# Altium PCB STM32F4_Template.PcbDoc
Units mil, origin at the board's own origin, x right, y up, seen from the top; angles counter-clockwise.
Board outline 3000 x 3050 mil, 4 copper layers (Top Layer, Ground Layer, Power Layer, Bottom Layer), stack 62.631 mil thick; 47 components, 31 nets, 206 pads, 112 vias.
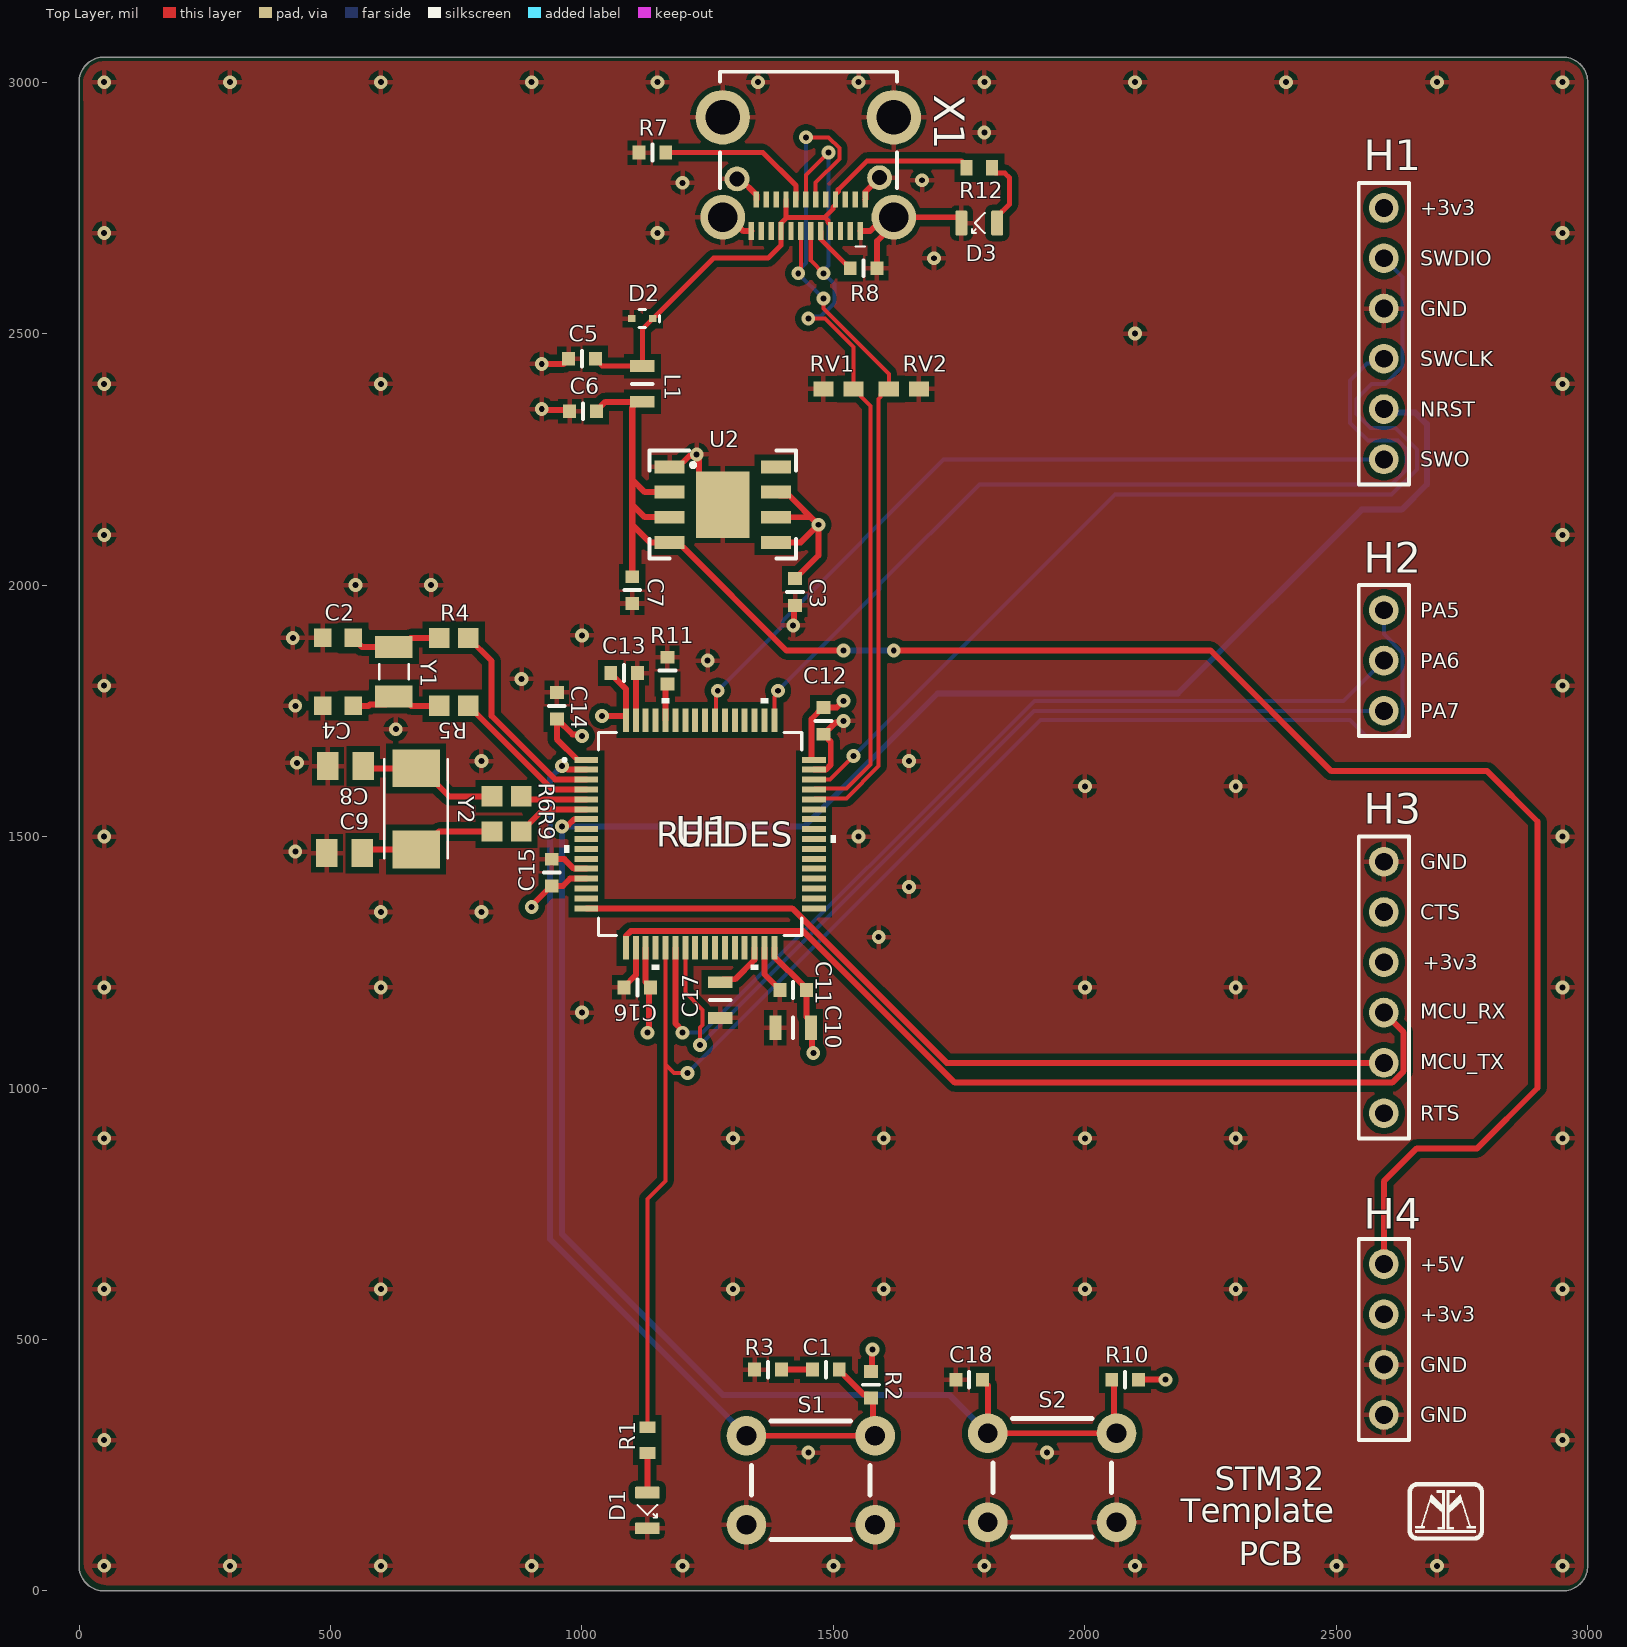
[diagram p0: Top Layer view]
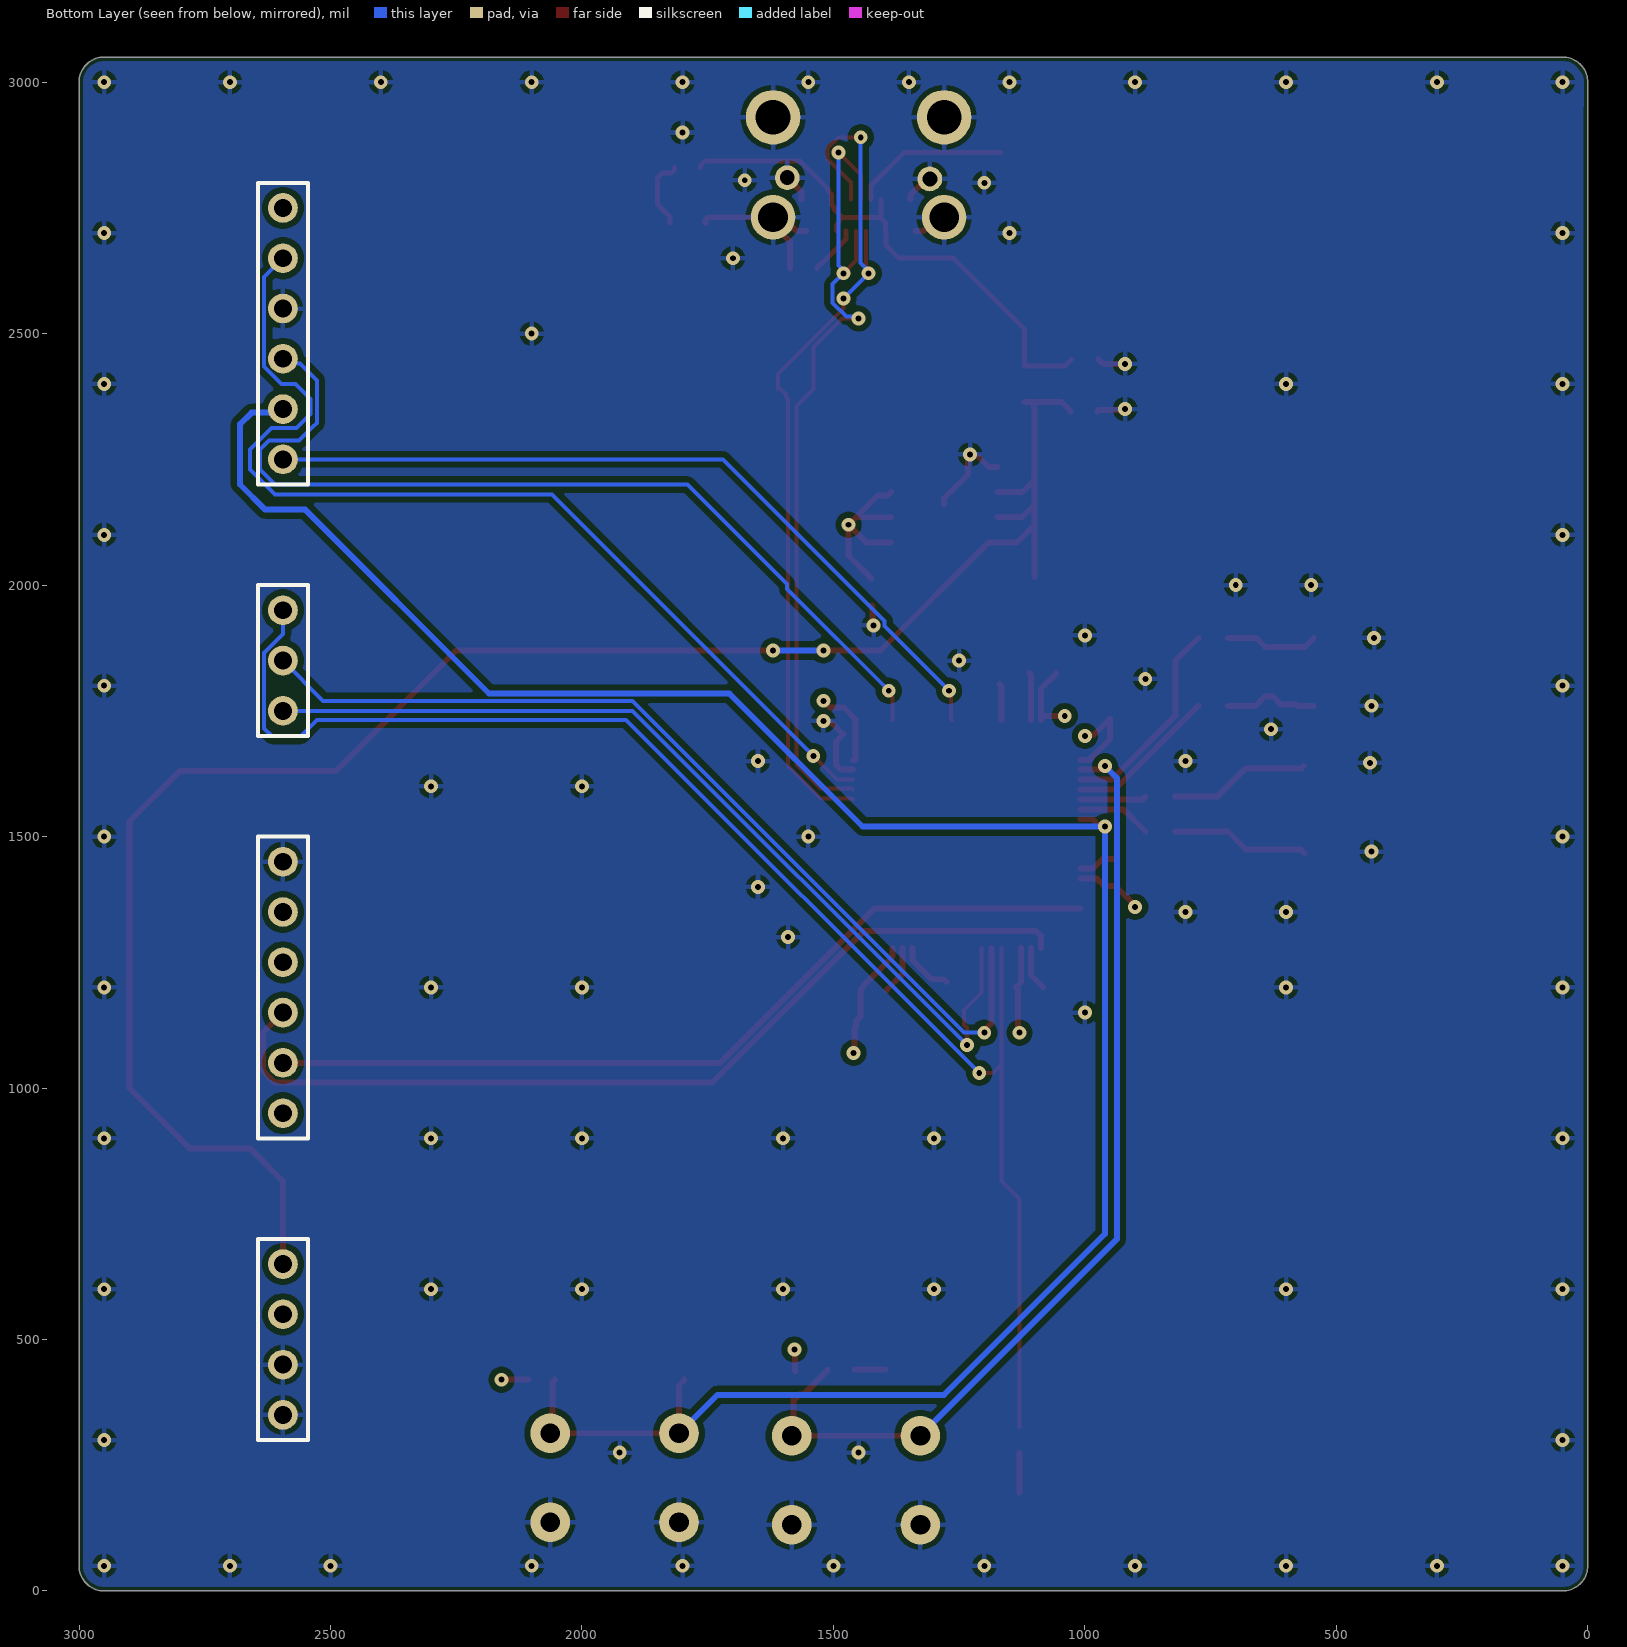
[diagram p1: Bottom Layer view, seen from below]
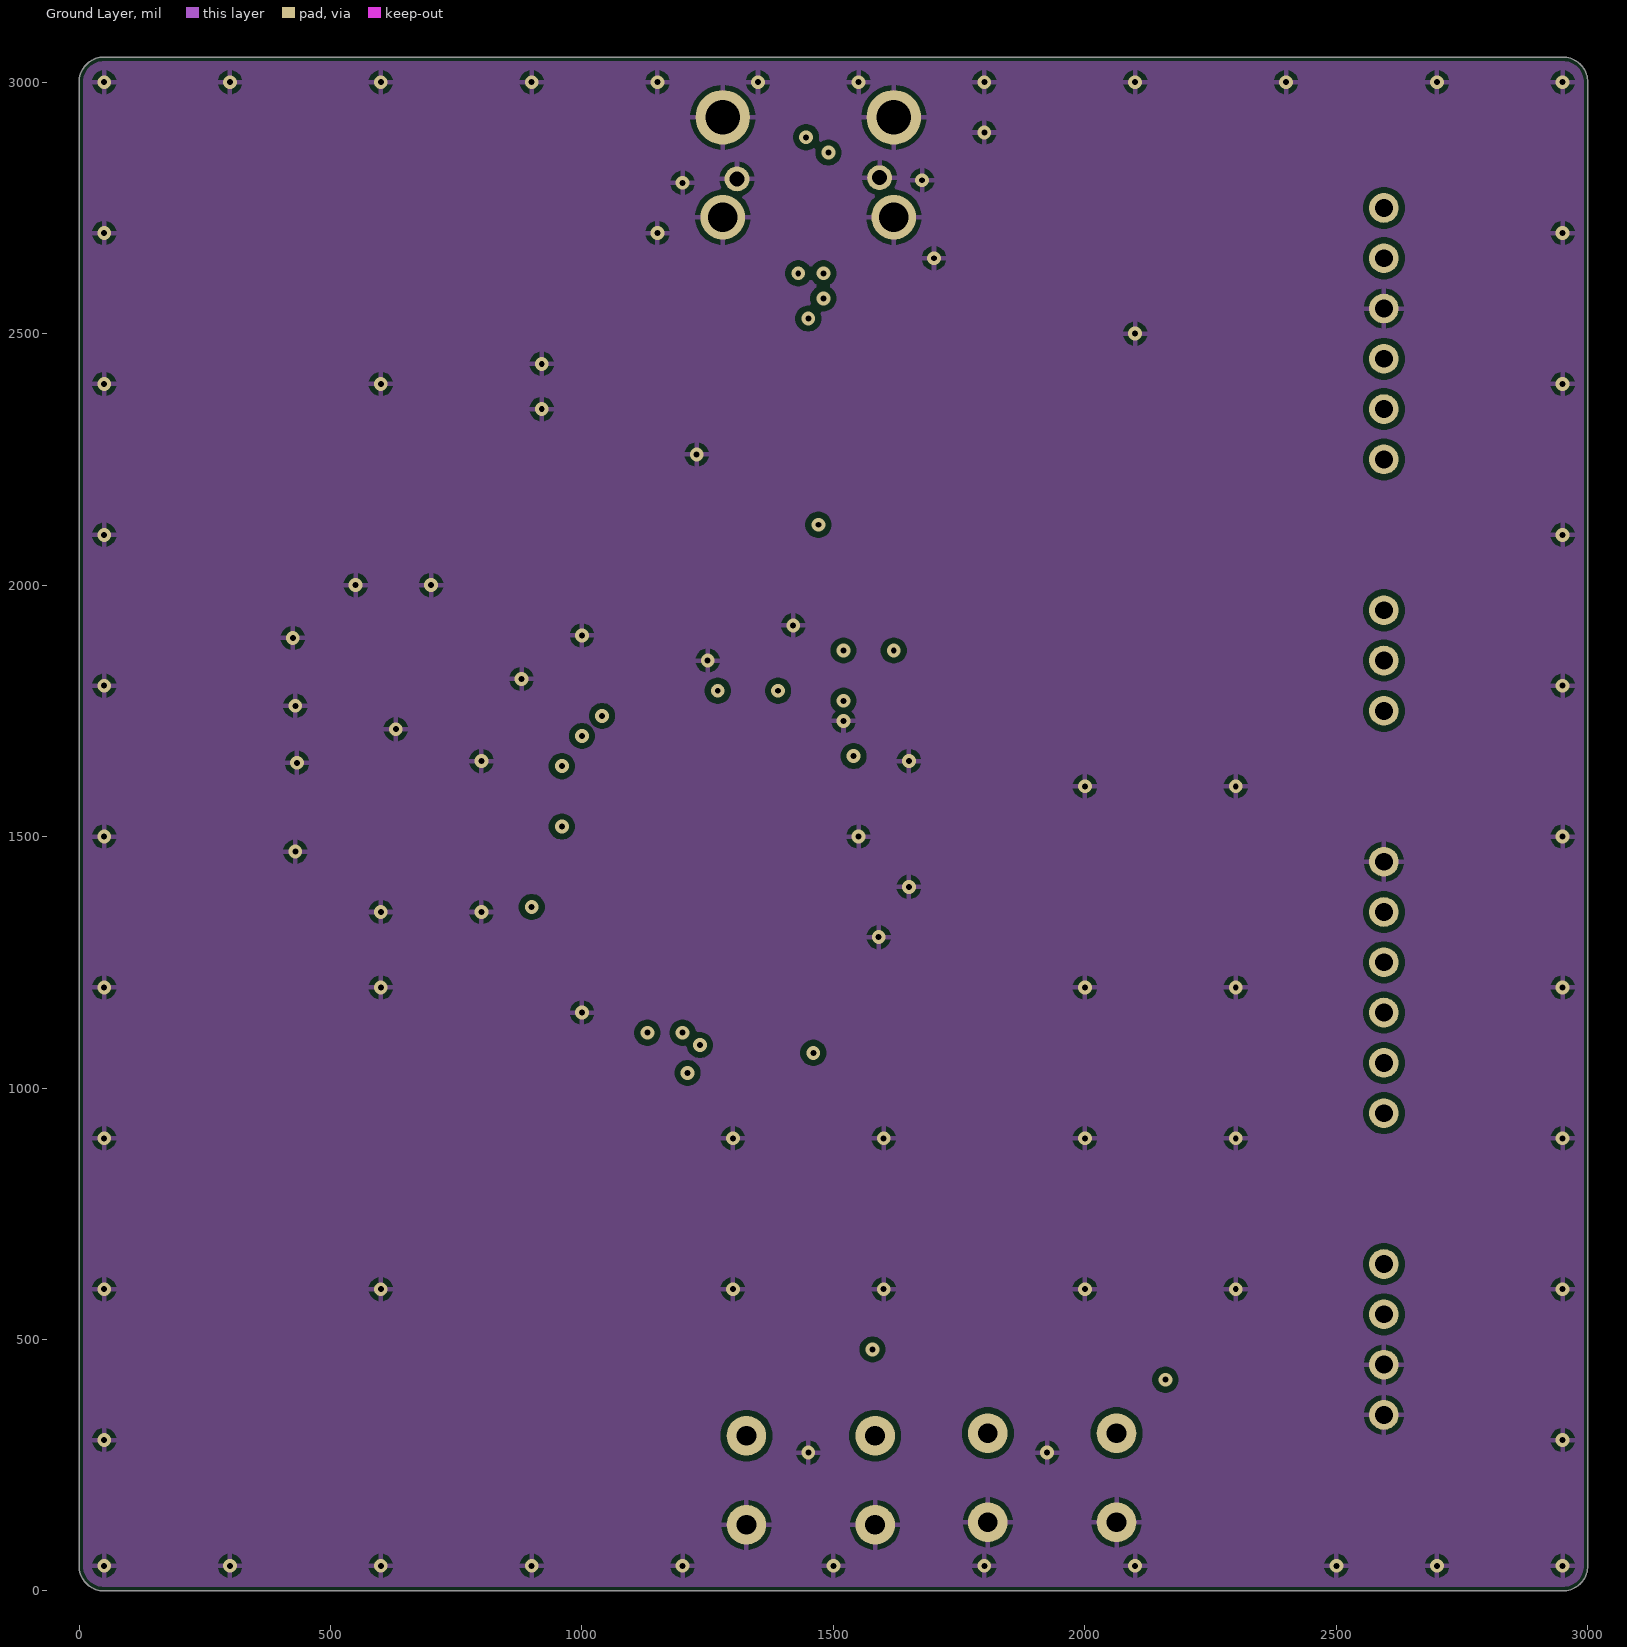
[diagram p2: Ground Layer]
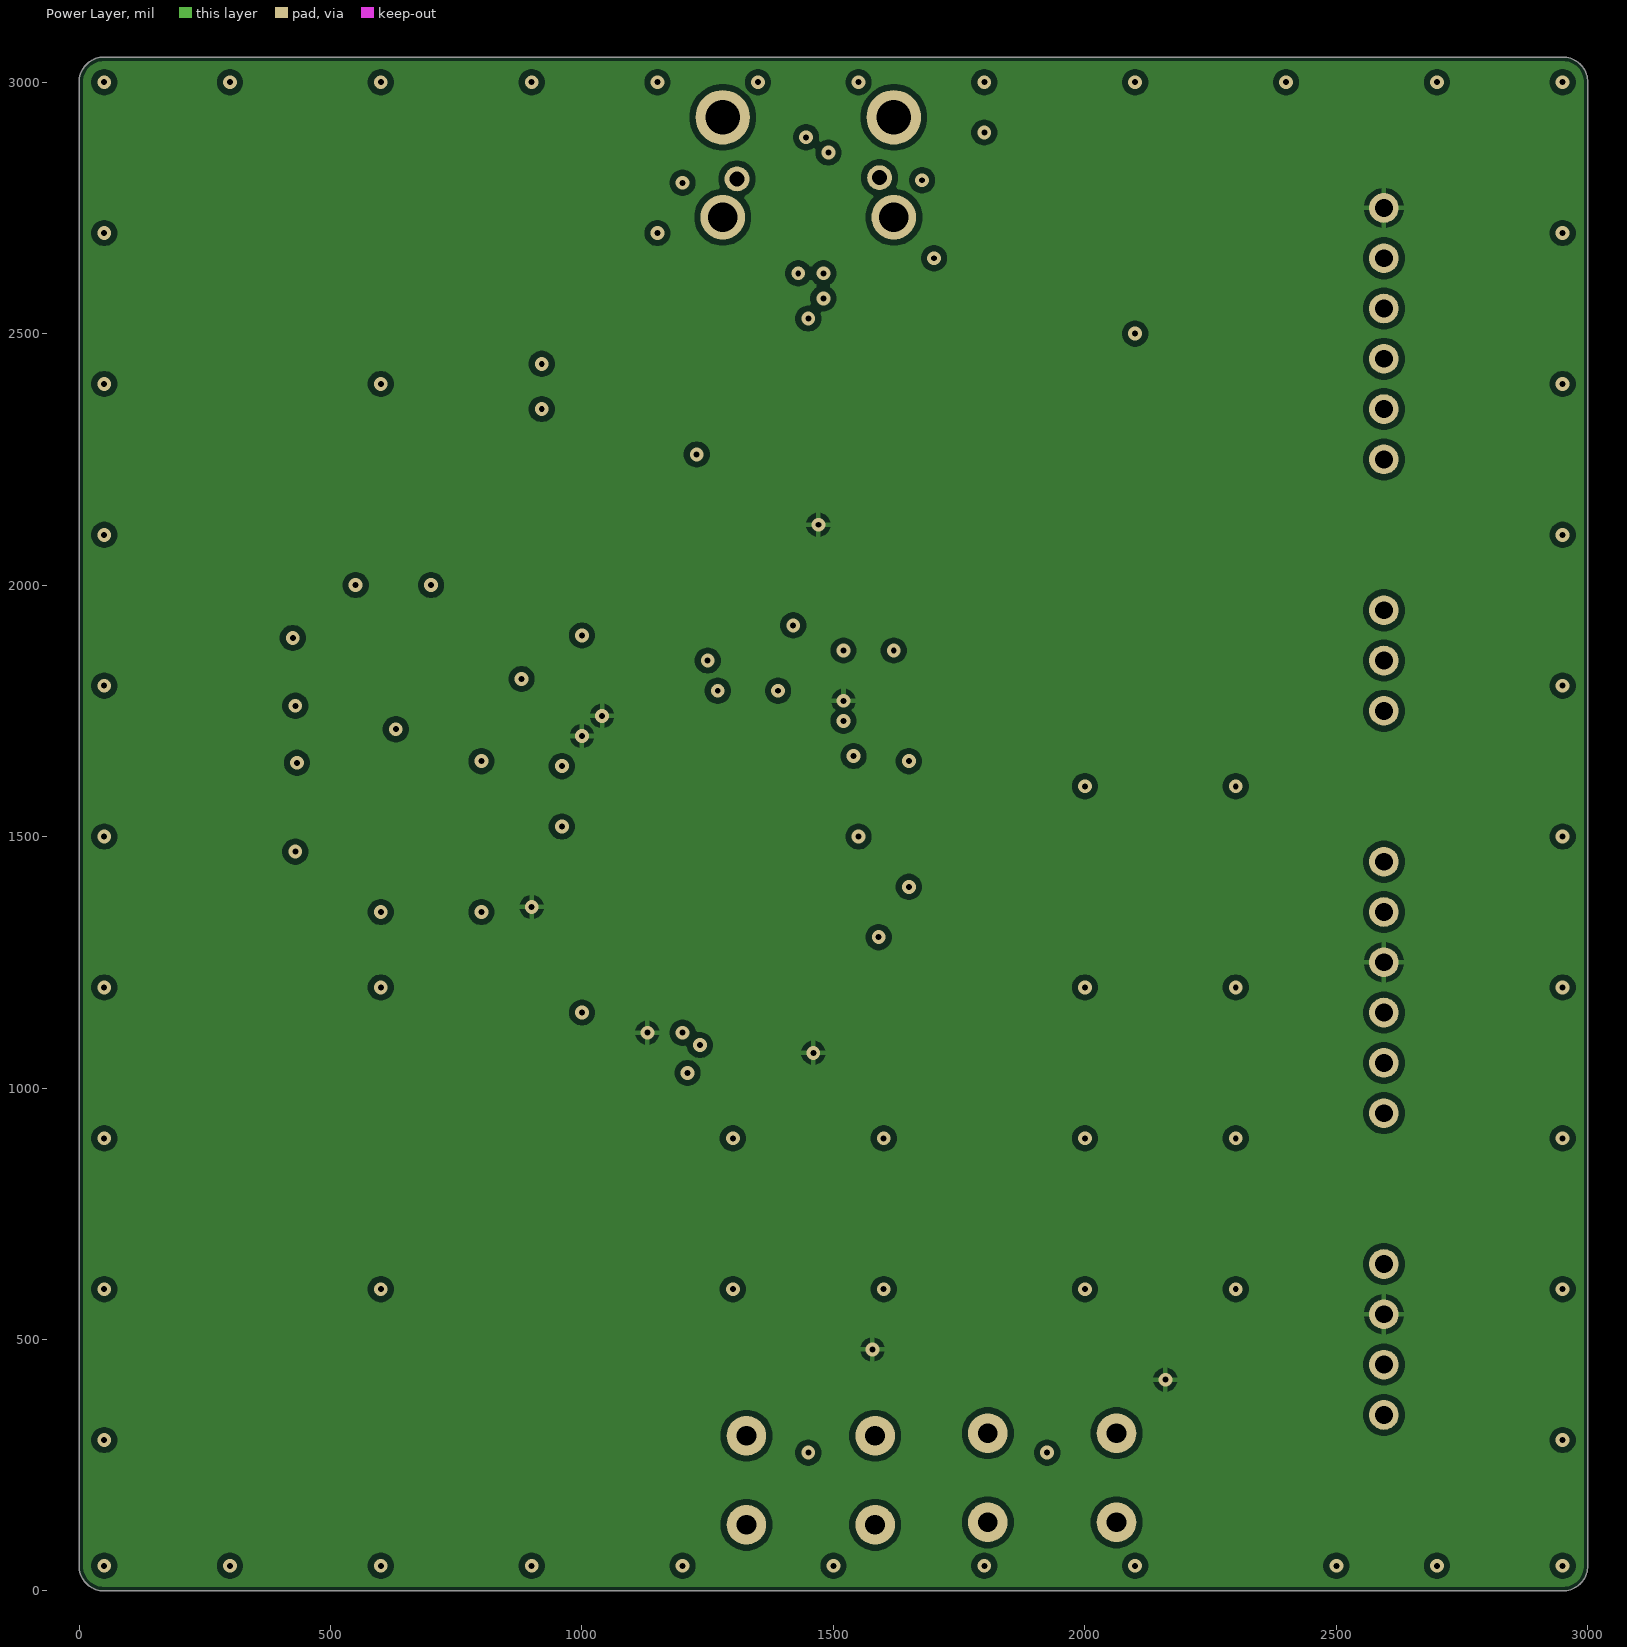
[diagram p3: Power Layer]
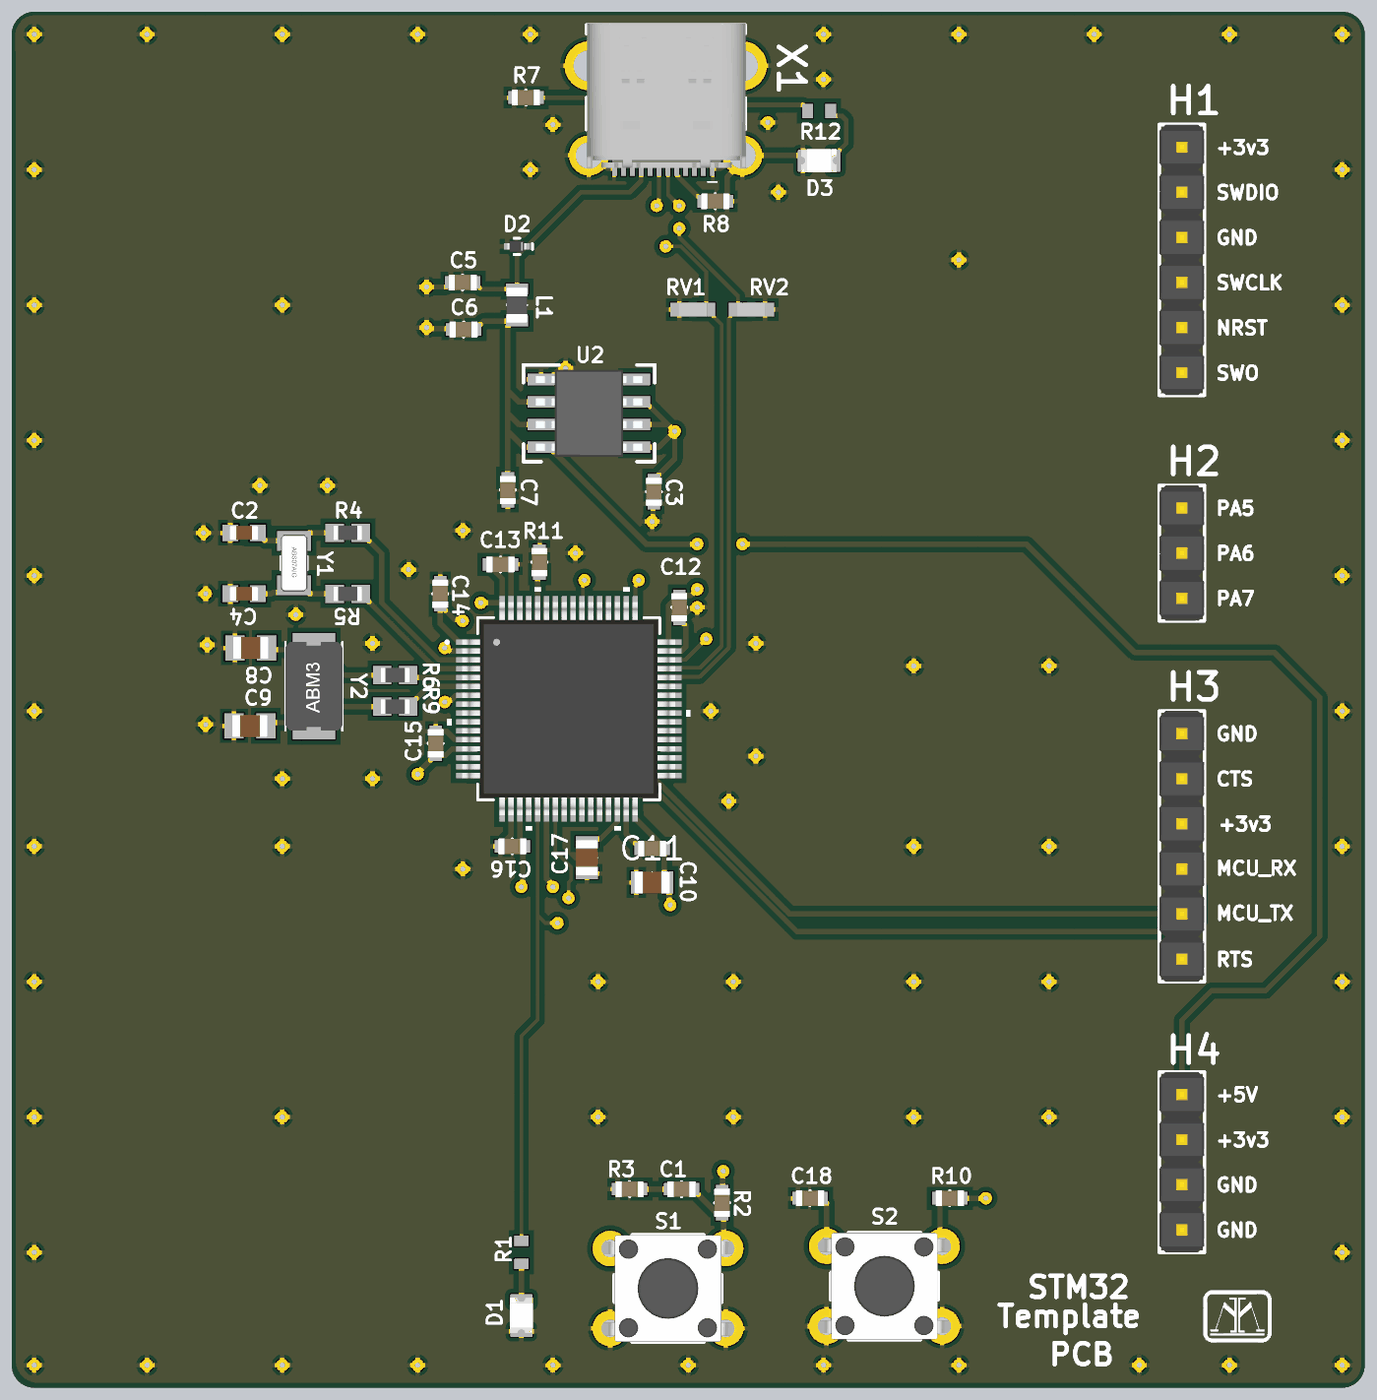
[diagram p4: 3D render of the assembled board from above, using the file's embedded part models]

## Layer stack, top to bottom
Top Solder: solder mask 0.4, Solder Resist, Dk 3.8
Top Layer: signal copper 1.378
Dielectric 2: prepreg 8.2839, 7628*1, Dk 4.4
Ground Layer: signal copper 0.689
Dielectric 1: dielectric 41.9291, FR-4, Dk 4.8
Power Layer: signal copper 0.689
Dielectric 3: prepreg 8.2839, 7628*1, Dk 4.4
Bottom Layer: signal copper 1.378
Bottom Solder: solder mask 0.4, Solder Resist, Dk 3.8

## Board outline
0,3000 cw(c50,3000) 50,3050 2950,3050 cw(c2950,3000) 3000,3000 3000,50 cw(c2950,50) 2950,0 50,0 cw(c50,50) 0,50

## Design rules (kind name [scope] priority, off if disabled: settings)
BoardOutlineClearance [All] p1: gap=7.87 ignorepadtopadclearanceinfootprint=FALSE
Clearance "inPolygon Clearance" [InPolygon] p1: gap=11.81 ignorepadtopadclearanceinfootprint=TRUE // this rule ensures that every net within a polygon of a different net has a set clearance from the poly
Clearance "Different Diff Pair" [All] p2: gap=7.87 ignorepadtopadclearanceinfootprint=TRUE
Clearance "Same Diff Pair" [All] p3: gap=3.94 ignorepadtopadclearanceinfootprint=TRUE
Clearance "Different Nets" [not InAnyDifferentialPair] p4: gap=11.81 ignorepadtopadclearanceinfootprint=TRUE except(3.94: Arc-SMDPad Arc-THPad Arc-Via Arc-Text Track-SMDPad Track-THPad Track-Via Track-Text SMDPad-Text THPad-Text Via-Text Fill-Text Poly-Text Region-Text Text-Text; 4.72: Arc-Arc Arc-Track Track-Track; 5.91: SMDPad-SMDPad SMDPad-THPad SMDPad-Via THPad-THPad THPad-Via Via-Via; 7.87: Arc-Hole Track-Hole SMDPad-Hole THPad-Hole Via-Hole Fill-Hole Poly-Hole Region-Hole Text-Hole)
Clearance "Same Net" [not InAnyDifferentialPair] p5: gap=0 ignorepadtopadclearanceinfootprint=TRUE except(3.94: THPad-Via; 7.09: Arc-Arc Arc-Track Track-Track)
ComponentClearance [All] p1: gap=4 collisioncheckmode=3 verticalgap=4 showdistances=TRUE
DiffPairsRouting "Ethernet Routing" [InDifferentialPairClass('Ethernet_Pairs')] p1: maxlimit=9.84 minlimit=7.87 mostfreqgap=9.84 toplayer_maxgap=7.87 toplayer_prefgap=7.87 toplayer_minwidth=9.84 toplayer_maxwidth=9.84 toplayer_prefwidth=9.84 midlayer1_mingap=9.84 midlayer1_minwidth=7.48 midlayer1_maxwidth=7.48 midlayer1_prefwidth=7.48 midlayer2_mingap=9.84 midlayer2_minwidth=7.48 midlayer2_maxwidth=7.48 midlayer2_prefwidth=7.48 bottomlayer_maxgap=7.87 bottomlayer_prefgap=7.87 bottomlayer_minwidth=9.84 bottomlayer_maxwidth=9.84 bottomlayer_prefwidth=9.84 impedanceprofiledriven=TRUE maxuncoupledlength=500
DiffPairsRouting "USB Routing" [InDifferentialPairClass('USB_Pairs')] p2: maxlimit=11.45 minlimit=4.99 mostfreqgap=11.45 toplayer_maxgap=4.99 toplayer_prefgap=4.99 toplayer_minwidth=9.07 toplayer_maxwidth=9.07 toplayer_prefwidth=9.07 midlayer1_mingap=11.45 midlayer1_minwidth=9.84 midlayer1_maxwidth=9.84 midlayer1_prefwidth=9.84 midlayer2_mingap=11.45 midlayer2_minwidth=9.84 midlayer2_maxwidth=9.84 midlayer2_prefwidth=9.84 bottomlayer_maxgap=4.99 bottomlayer_prefgap=4.99 bottomlayer_minwidth=9.07 bottomlayer_maxwidth=9.07 bottomlayer_prefwidth=9.07 impedanceprofiledriven=TRUE impedanceprofileid={ED78B7FE-5BC8-4D43-B126-C4DF268A2158} impedanceprofilevalue=90.000000 maxuncoupledlength=500
DiffPairsRouting "CAN Routing" [InDifferentialPairClass('CAN_Pairs')] p3: maxlimit=35.69 minlimit=19.68 mostfreqgap=35.69 toplayer_maxgap=19.68 toplayer_prefgap=19.68 toplayer_minwidth=7.93 toplayer_maxwidth=7.93 toplayer_prefwidth=7.93 midlayer1_mingap=35.69 midlayer1_minwidth=6.1 midlayer1_maxwidth=6.1 midlayer1_prefwidth=6.1 midlayer2_mingap=35.69 midlayer2_minwidth=6.1 midlayer2_maxwidth=6.1 midlayer2_prefwidth=6.1 bottomlayer_maxgap=19.68 bottomlayer_prefgap=19.68 bottomlayer_minwidth=7.93 bottomlayer_maxwidth=7.93 bottomlayer_prefwidth=7.93 impedanceprofiledriven=TRUE maxuncoupledlength=500
Height [All] p1: minheight=0 maxheight=71497.94 prefheight=500
HoleSize [All] p1: absolutevalues=TRUE maxlimit=248.03 minlimit=11.81 maxpercent=80.000 minpercent=20.000
HoleToHoleClearance [All] p1: gap=9.84 allowstackedmicrovias=FALSE
Length [All] p1: maxlimit=1709.92 minlimit=0 usedelayunits=TRUE mindelay=0.000000 maxdelay=10000.000000
MatchedLengths "Diff Pair Matched Delays" [InDifferentialPairClass('Ethernet_Pairs') or InDifferentialPairClass('USB_Pairs') or InDifferentialPairClass('CAN_Pairs')] p1: tolerance=196.85 checknetsindiffpair=TRUE checkdiffpairvsdiffpair=FALSE checkxsignals=FALSE checkothers=FALSE usedelayunits=TRUE delaytolerance=100.000000
MinimumAnnularRing [All] p1: minimumring=7.87
MinimumSolderMaskSliver [All] p1: minsoldermaskwidth=0
PlaneClearance "Supply Net Clearance" [InNetClass('Supply_Nets')] p1: clearance=19.68
PlaneClearance "All Nets" [All] p2: clearance=11.81
PolygonConnect "Supply Nets" [InNetClass('Supply_Nets')] p1: connectstyle=Relief reliefconductorwidth=11.81 reliefentries=4 polygonreliefangle="90 Angle" conductorbypadedge=TRUE mindistance=15 enablemindistance=FALSE airgapwidth=10
PolygonConnect General [All] p2: connectstyle=Relief reliefconductorwidth=10 reliefentries=4 polygonreliefangle="90 Angle" airgapwidth=10
RoutingVias [All] p1: holewidth=7.87 width=13.78 viastyle="Through Hole" minholewidth=5.91 minwidth=11.81 maxholewidth=248.03 maxwidth=257.87
SilkToSilkClearance [All] p1: silktosilkclearance=0
SilkToSolderMaskClearance [All] p1: minsilkscreentomaskgap=0 clearancetoexposedcopper=TRUE
SolderMaskExpansion [All] p1: expansion=2.95 istentingtop=FALSE
SupplyNets "Schematic Supply Nets_3" [InNet('GND')] p1: voltage=0.000
SupplyNets "Schematic Supply Nets_8" [InNet('RUN')] p2: voltage=0.000
SupplyNets "Schematic Supply Nets_6" [InNet('XOUT')] p3: voltage=0.000
SupplyNets "Schematic Supply Nets_4" [InNet('+1V1')] p4: voltage=0.000
SupplyNets "Schematic Supply Nets_2" [InNet('+5V')] p5: voltage=0.000
SupplyNets "Schematic Supply Nets" [InNet('XIN')] p6: voltage=0.000
SupplyNets "Schematic Supply Nets_7" [InNet('+3V3')] p7: voltage=0.000
SupplyNets "Schematic Supply Nets_1" [InNet('Earth')] p8: voltage=0.000
UnRoutedNet [All] p1: checkbadconnections=TRUE
Width "nRF Width" [InNetClass('nRF Signal')] p1: maxlimit=14.94 minlimit=10.37 preferedwidth=14.94 toplayer_minwidth=14.94 midlayer1_maxwidth=10.37 midlayer1_prefwidth=10.37 midlayer2_maxwidth=10.37 midlayer2_prefwidth=10.37 bottomlayer_minwidth=14.94 impedanceprofiledriven=TRUE minimp=50.000000 maximp=50.000000 favimp=50.000000 checkconnectedcopper=TRUE
Width [All] p2: maxlimit=3937.01 minlimit=3.94 preferedwidth=11.81
20 further rules are at their usual default settings.

## Classes and differential pairs
differential pair class DIFF_USB: USB_D
differential pair USB_D: +USB_D_P -USB_D_N

## Components (designator, comment, footprint, x,y, rotation, side; value= is the part's Value field where it differs from the comment)
C1 "[Cap] 0603 0.1uF 10% 16V" "[Cap] SMD 0603" 1485,440 r0 top
C2 "8pF" "[Cap] 0603 8pF ±0.1pF 50V" 515,1895 r180 top
C3 "[Cap] 0603 10uF 10% 10V" "[Cap] SMD 0603" 1423.78,1986.22 r270 top
C4 "8pF" "[Cap] 0603 8pF ±0.1pF 50V" 515,1760 r180 top
C5 "[Cap] 0603 0.1uF 10% 16V" "[Cap] SMD 0603" 1000,2450 r180 top
C6 "[Cap] 0603 0.1uF 10% 16V" "[Cap] SMD 0603" 1001.97,2345.59 r180 top
C7 "[Cap] 0603 10uF 10% 10V" "[Cap] SMD 0603" 1100,1990 r90 top
C8 "[Cap] 0805 18pF ±5% 250V" "[Cap] 0805 ±5% 250V" 530,1640 r180 top
C9 "[Cap] 0805 18pF ±5% 250V" "[Cap] 0805 ±5% 250V" 528,1467 r180 top
C10 "[Cap] 0805 4.7uF 10% 50V" "[Cap] SMD 0805" 1420,1120 r0 top
C11 "[Cap] 0603 0.1uF 10% 16V" "[Cap] SMD 0603" 1420,1195 r0 top
C12 "[Cap] 0603 0.1uF 10% 16V" "[Cap] SMD 0603" 1480,1730 r270 top
C13 "[Cap] 0603 0.1uF 10% 16V" "[Cap] SMD 0603" 1083.78,1825 r0 top
C14 "[Cap] 0603 0.1uF 10% 16V" "[Cap] SMD 0603" 950,1760 r90 top
C15 "[Cap] 0603 0.1uF 10% 16V" "[Cap] SMD 0603" 940,1428.43 r90 top
C16 "[Cap] 0603 0.1uF 10% 16V" "[Cap] SMD 0603" 1110,1200 r0 top
C17 "[Cap] 0805 4.7uF 10% 50V" "[Cap] SMD 0805" 1275,1175 r90 top
C18 "[Cap] 0603 0.1uF 10% 16V" "[Cap] SMD 0603" 1770,420 r180 top
D1 "[LED] SMD 0805 Green" "[LED] SMD 0805" 1130,160 r270 top
D2 "Cathode side marked by line" "[TVS] UNIDIRECTIONAL FOR 5V ESD" 1120,2530 r180 top
D3 "[LED] SMD 0805 Red" "[LED] SMD 0805" 1790,2720 r180 top
H1 "SWD Header" "[Header] 1x6 Male STM32 SWD" 2594.56,2500 r270 top
H2 "GPIO Header" "[Header] 1x3 Male GPIO" 2594.55,1850 r270 top
H3 "UART Header" "[Header] 1x6 Male STM32 UART" 2594.56,1200 r270 top
H4 "1x4 Header" "[Header] 1x4 Male Power" 2594.55,500 r270 top
L1 "652-MH2029-300Y" "[Ferrite] SMD 0805" 1120,2400 r270 top
R1 "RC0603JR-13470RL" RESC1608X55X25LL10T15 1130,300 r270 top
R2 "[10k] SMD 0603 1% 1/8W" "[Res] SMD 0603" 1575,410 r270 top
R3 "[100] SMD 0603 1% 1/10W" "[Res] SMD 0603" 1370,440 r0 top
R4 "[0] SMD 0603 5% 1/10W" "[0] SMD 0603 5% 1/10W" 745,1895 r180 top
R5 "[0] SMD 0603 5% 1/10W" "[0] SMD 0603 5% 1/10W" 745,1760 r180 top
R6 "[0] SMD 0603 5% 1/10W" "[0] SMD 0603 5% 1/10W" 850,1580 r180 top
R7 "[5.1k] SMD 0603 1% 1/10W" "[Res] SMD 0603" 1140,2860 r180 top
R8 "[5.1k] SMD 0603 1% 1/10W" "[Res] SMD 0603" 1560,2630 r0 top
R9 "[0] SMD 0603 5% 1/10W" "[0] SMD 0603 5% 1/10W" 850,1510 r180 top
R10 "[10k] SMD 0603 1% 1/8W" "[Res] SMD 0603" 2080,420 r0 top
R11 "[10k] SMD 0603 1% 1/8W" "[Res] SMD 0603" 1170,1830 r90 top
R12 "RC0603JR-13470RL" RESC1608X55X25LL10T15 1790,2830 r0 top
RV1 "[ESD] SMD Varistor for USB 3.3V lines" "[ESD] SMD Varistor for USB 3.3V lines" 1510,2390 r180 top
RV2 "[ESD] SMD Varistor for USB 3.3V lines" "[ESD] SMD Varistor for USB 3.3V lines" 1640,2390 r0 top
S1 "Standard pushbutton" "[SPST] Pushbutton" 1455,220 r180 top
S2 "Standard pushbutton" "[SPST] Pushbutton" 1935,225 r0 top
U1 "STM32F446RET6" STM32F446RET6 1235,1505 r0 top
U2 "3V3 1.5A" "[Linear] 3V3 1.5A" 1280,2160 r0 top
X1 "USB-C" "[USB] USB-C Right-Angle" 1450,2860 r180 top
Y1 "ABS07-32.768KHZ" ABS07-32.768KHZ 626,1828 r270 top
Y2 "ABM3-8.000MHZ" ABM3-8.000MHZ 670,1555 r90 top

## Footprints (in the part's own frame and the unit in brackets; to place one, negate y for a bottom-side part, rotate by r counter-clockwise, add the part's x,y. Pads: shape width x height; smd on the part's side, far side on the other; paste and mask are expansions set on the pad)
"[0] SMD 0603 5% 1/10W" [mm]
  rect 1.04x1.02 smd: 1(-0.735,0) 2(0.735,0)
  body extent -0.8,-0.4 0.8,0.4, height 0.55
"[Cap] 0603 8pF ±0.1pF 50V" [mm]
  rect 0.89x0.93 smd paste+0 mask+0.102: 1(-0.77,0) 2(0.77,0)
  body extent -0.8,-0.4 0.8,0.4, height 0.9
"[Cap] 0805 ±5% 250V" [mm]
  rect 1.08x1.42 smd paste+0 mask+0.102: 1(-0.895,0) 2(0.895,0)
  body extent -1,-0.63 1,0.63, height 1
"[Cap] SMD 0603" [mm]
  rect 0.65x0.7 smd: 1(-0.675,0) 2(0.675,0)
  silkscreen extent 0,-0.4 0,0.4, body extent -0.8,-0.45 0.8,0.45, height 0.8
"[Cap] SMD 0805" [mm]
  rect 0.6x1.25 smd: 1(-0.9,0) 2(0.9,0)
  silkscreen extent 0,-0.53 0,0.53, body extent -1,-0.63 1,0.63, height 1
"[ESD] SMD Varistor for USB 3.3V lines" [mm]
  rect 1.02x0.76 smd: 1(-0.76,0) 2(0.76,0)
  body extent -0.8,-0.4 0.8,0.4, height 0.45
"[Ferrite] SMD 0805" [mm]
  rect 0.6x1.25 smd: 1(-0.9,0) 2(0.9,0)
  silkscreen extent 0,-0.53 0,0.53, body extent -1,-0.6 1,0.6, height 1.1
"[Header] 1x3 Male GPIO" [mm]
  round 1.5 hole 0.9: 1(-2.54,0) 2(0,0) 3(2.54,0)
  silkscreen extent -3.81,-1.27 3.81,1.27, body extent -3.81,-1.27 3.81,1.27, height 9.5
"[Header] 1x4 Male Power" [mm] "2.54mm pitch"
  round 1.5 hole 0.9: 1(-3.81,0) 2(-1.27,0) 3(1.27,0) 4(3.81,0)
  silkscreen extent -5.08,-1.27 5.08,1.27, body extent -5.08,-1.27 5.08,1.27, height 9.5
"[Header] 1x6 Male STM32 SWD" [mm]
  round 1.5 hole 0.9: 1(-6.35,0) 2(-3.81,0) 3(-1.27,0) 4(1.27,0) 5(3.81,0) 6(6.35,0)
  silkscreen extent -7.62,-1.27 7.62,1.27, body extent -7.62,-1.27 7.62,1.27, height 9.5
"[Header] 1x6 Male STM32 UART" [mm]
  round 1.5 hole 0.9: 1(-6.35,0) 2(-3.81,0) 3(-1.27,0) 4(1.27,0) 5(3.81,0) 6(6.35,0)
  silkscreen extent -7.62,-1.27 7.62,1.27, body extent -7.62,-1.27 7.62,1.27, height 9.5
"[LED] SMD 0805" [mm]
  rrect20% 0.6x1.25 smd: 1(-0.9,0) 2(0.9,0)
  silkscreen extent -0.28,-0.51 0.37,0.51, body extent -1,-0.65 1,0.65, height 0.8
"[Linear] 3V3 1.5A" [mm]
  rect 1.525x0.65 smd: 1(-2.688,1.905) 2(-2.688,0.635) 3(-2.688,-0.635) 4(-2.688,-1.905) 5(2.688,-1.905) 6(2.688,-0.635) 7(2.688,0.635) 8(2.688,1.905)
  rect 2.71x3.35 smd: 9(0,0)
  silkscreen extent -3.7,-2.73 3.7,2.73, body extent -3,-2.45 3,2.45, height 1.5
"[Res] SMD 0603" [mm]
  rect 0.65x0.7 smd: 1(-0.675,0) 2(0.675,0)
  silkscreen extent 0,-0.4 0,0.4, body extent -0.8,-0.45 0.8,0.45, height 0.8
"[SPST] Pushbutton" [mm] "(Regular pushbutton)"
  round 2 hole 1: 1(-3.25,2.25) 1(3.25,2.25) 2(-3.25,-2.25) 2(3.25,-2.25)
  silkscreen extent -3,-3 3,3, body extent -3.85,-3 3.85,3, height 4.95
"[TVS] UNIDIRECTIONAL FOR 5V ESD" [mil]
  rect 15x14 smd paste+0 mask+0: 1(-21.17,0) 2(21.17,0)
  silkscreen extent -34,-18 7,18, body extent -21,-13 21,13, height 16
"[USB] USB-C Right-Angle" [mm]
  rect 0.27x0.9 smd: A1(-2.625,3.965) A2(-2.125,3.965) A3(-1.625,3.965) A4(-1.125,3.965) A5(-0.625,3.965) A6(-0.125,3.965) A7(0.375,3.965) A8(0.875,3.965) A9(1.375,3.965) A10(1.875,3.965) A11(2.375,3.965) A12(2.875,3.965)
  rect 0.27x0.8 smd: B1(2.625,2.365) B2(2.125,2.365) B3(1.625,2.365) B4(1.125,2.365) B5(0.625,2.365) B6(0.125,2.365) B7(-0.375,2.365) B8(-0.875,2.365) B9(-1.375,2.365) B10(-1.875,2.365) B11(-2.375,2.365) B12(-2.875,2.365)
  round 2.25 hole 1.5: MH(-4.32,3.265) MH(4.32,3.265)
  round 2.75 hole 1.75: MH(-4.32,-1.785) MH(4.32,-1.785)
  round 1.25 hole 0.75: MH(-3.6,1.265) MH(3.6,1.33)
  silkscreen extent -4.47,-4.09 4.47,4.75, body extent -4.51,-4.16 4.43,4.01, height 2.92
ABM3-8.000MHZ [mm]
  rect 1.9x2.4 smd: 1(-2.05,0) 2(2.05,0)
  silkscreen extent -2.5,-1.6 2.5,1.6, body extent -2.5,-1.6 2.5,1.6, height 1.3
ABS07-32.768KHZ [mm]
  rect 1.1x1.9 smd: 1(-1.25,0) 2(1.25,0)
  silkscreen extent -0.38,-0.75 0.38,0.75, body extent -1.6,-0.75 1.6,0.75, height 0.9
RESC1608X55X25LL10T15 [mm] "Chip Resistor, 2-Leads, Body 1.60x0.80mm, IPC High Density"
  rect 0.6x0.8 smd: 1(-0.65,0) 2(0.65,0)
  body extent -0.85,-0.45 0.85,0.45, height 0.55
STM32F446RET6 [mil]
  rect 47x12 smd paste+0 mask+0: 1(-226.38,147.64) 2(-226.38,127.95) 3(-226.38,108.27) 4(-226.38,88.58) 5(-226.38,68.9) 6(-226.38,49.21) 7(-226.38,29.53) 8(-226.38,9.84) 9(-226.38,-9.84) 10(-226.38,-29.53) 11(-226.38,-49.21) 12(-226.38,-68.9) 13(-226.38,-88.58) 14(-226.38,-108.27) 15(-226.38,-127.95) 16(-226.38,-147.64) 33(226.38,-147.64) 34(226.38,-127.95) 35(226.38,-108.27) 36(226.38,-88.58) 37(226.38,-68.9) 38(226.38,-49.21) 39(226.38,-29.53) 40(226.38,-9.84) 41(226.38,9.84) 42(226.38,29.53) 43(226.38,49.21) 44(226.38,68.9) 45(226.38,88.58) 46(226.38,108.27) 47(226.38,127.95) 48(226.38,147.64)
  rect 12x47 smd paste+0 mask+0: 17(-147.64,-226.38) 18(-127.95,-226.38) 19(-108.27,-226.38) 20(-88.58,-226.38) 21(-68.9,-226.38) 22(-49.21,-226.38) 23(-29.53,-226.38) 24(-9.84,-226.38) 25(9.84,-226.38) 26(29.53,-226.38) 27(49.21,-226.38) 28(68.9,-226.38) 29(88.58,-226.38) 30(108.27,-226.38) 31(127.95,-226.38) 32(147.64,-226.38) 49(147.64,226.38) 50(127.95,226.38) 51(108.27,226.38) 52(88.58,226.38) 53(68.9,226.38) 54(49.21,226.38) 55(29.53,226.38) 56(9.84,226.38) 57(-9.84,226.38) 58(-29.53,226.38) 59(-49.21,226.38) 60(-68.9,226.38) 61(-88.58,226.38) 62(-108.27,226.38) 63(-127.95,226.38) 64(-147.64,226.38)
  silkscreen extent -273,-270 270,270, body extent -236,-236 236,236, height 63

## Part data
C1 C5 C6 C11 C12 C13 C14 C15 C16 C18: "CC0603KRX7R7BB104", Capacitance=100nF, Max Voltage=16V, Size Package=0603, Supplier Part Number 1=311-1088-6-ND, Tolerance=10%, Supplier 1=DigiKey
C2 C4: library part "[Cap] 0603 8pF ±0.1pF 50V", "GRM1555C1H8R0BA01D", Manufacturer_Name=Murata, Capacitance=8pF, Copyright="Copyright (C) 2026 Ultra Librarian. All rights reserved.", Digi-Key_Part_Number_1=490-8230-1-ND, Digi-Key_Part_Number_2=490-8230-2-ND, Digi-Key_Part_Number_3=490-8230-6-ND, Manufacturer_Part_Number=GRM1555C1H8R0BA01D, Siz=0603, Supplier 1="Arrow Electronics"
C3 C7: "CL10A106KP8NNNC", Capacitance=10uF, Max Voltage=10V, Size Package=0603, Supplier Part Number 1=1276-1192-6-ND, Tolerance=10%, Supplier 1=DigiKey
C8 C9: "GQM2195C2E180JB12D", Capacitance=18pF, Package="2012 Murata", Check_prices=https://www.snapeda.com/parts/GQM2195C2E270JB12D/Murata/view-part/?ref=eda, MF=Murata, MP=GQM2195C2E270JB12D, Size=0805, SnapEDA_Link=https://www.snapeda.com/parts/GQM2195C2E270JB12D/Murata/view-part/?ref=snap, Supplier 1="Arrow Electronics"
C10 C17: "GRT21BR61H475KE13L", Capacitance=4.7uF, Max Voltage=50V, Size Package=0805, Supplier Part Number 1=490-12394-1-ND, Tolerance=10%, Supplier 1=DigiKey
D1: "LG R971-KN-1-0-20-R18", Color=Green, Size Package=0805, Supplier Part Number 1=475-LGR971-KN-1CT-ND, Supplier 1=DigiKey
D2: library part "[TVS] Unidirectional for 5V ESD", "D5V0F1U2S9-7", Manufacturer_Name="Diodes Inc", Reverse Breakdown Voltage=5.5V, Size Package=0603, Copyright="Copyright (C) 2025 Ultra Librarian. All rights reserved.", Manufacturer_Part_Number=D5V0F1U2S9-7, Supplier 1=Avnet, Supplier Part Number 1=D5V0F1U2S9-7
D3: "LS R976-NR-1-0-20-R18", Color=Red, Size Package=0805, Supplier Part Number 1=475-LSR976-NR-1CT-ND, Supplier 1=DigiKey
H1: library part "[Header] 1x6 Male STM32 SWD", "2.54mm pitch"
H2: library part "[Header] 1x3 Male GPIO", "2.54mm pitch"
H3: library part "[Header] 1x6 Male STM32 UART", "2.54mm pitch"
H4: library part "[Header] 1x4 Male Power", "2.54mm pitch"
L1: library part "[Ferrite] SMD 0805 3A 30ohm", Res @ Freq="30 @ 100MHz", Size Package=0805, Supplier Part Number 1=MH2029-300YCT-ND, Supplier 1=DigiKey
R1 R12: library part CMP-2000-04326-1, Manufacturer=Yageo, Resistance=470, Size Package=0603, Part Number=RC0603JR-13470RL
R2 R10 R11: "RC0805JR-0710KL", Resistance=10k, Size Package=0805, Supplier Part Number 1=311-10KARCT-ND, Tolerance=5%, Supplier 1=DigiKey, Wattage=1/8W
R3: "RC0603FR-07100RL", Resistance=100, Size Package=0603, Supplier Part Number 1=311-100HRDKR-ND, Tolerance=1%, Supplier 1=DigiKey, Wattage=1/10W
R4 R5 R6 R9: "RC0603JR-070RL", Package="0603 Yageo", Resistance=0, Size Package=0603, Tolerance=5%, Check_prices=https://www.snapeda.com/parts/RC0603JR-070RL/Yageo/view-part/?ref=eda, MF=Yageo, MP=RC0603JR-070RL, SnapEDA_Link=https://www.snapeda.com/parts/RC0603JR-070RL/Yageo/view-part/?ref=snap, Supplier 1=Avnet, Supplier Part Number 1=RC0603JR-070RL, Wattage=1/10W
R7 R8: "RC0603FR-075K1L", Resistance=5.1k, Size Package=0603, Supplier Part Number 1=311-5.10KHRCT-ND, Tolerance=1%, Supplier 1=DigiKey, Wattage=1/10W
RV1 RV2: "Varistor 1 Circuit Surface Mount, MLCV 0603 (1608 Metric) CG0603MLU-05E", Package="0603 Bourns", Check_prices=https://www.snapeda.com/parts/CG0603MLU-05E/Bourns/view-part/?ref=eda, MF=Bourns, MP=CG0603MLU-05E, SnapEDA_Link=https://www.snapeda.com/parts/CG0603MLU-05E/Bourns/view-part/?ref=snap, Supplier 1=Avnet
S1 S2: library part "[SPST] Pushbutton", Supplier Part Number 1=450-1650-ND, Supplier 1=DigiKey
U1: "High-performance foundation line, Arm Cortex-M4 core with DSP and FPU, 512 Kbytes of Flash memory, 180 MHz CPU, ART Accelerator, Dual QSPI", Manufacturer_Name=STMicroelectronics, Supplier Part Number 1=52Y1122, Copyright="Copyright (C) 2025 Ultra Librarian. All rights reserved.", Manufacturer_Part_Number=STM32F446RET6, RefDes=RefDes, Supplier 1=Avnet, Type=Type
U2: library part "[Linear] 3V3 1.5A", "AP7362A-33SP-13", Supplier Part Number 1=AP7362A-33SP-13DICT-ND, Supplier 1=DigiKey
X1: library part "[USB] Type-C Right-Angle", Supplier Part Number 1=670-3104-1-ND, Supplier 1=DigiKey
Y1: "ABS07-32.768KHZ-9-T, 32.768 kHz Â±20ppm Crystal 9pF 70 kOhms 2-SMD, No Lead", Package="SMD-2 Abracon LLC", Supplier Part Number 1=ABS07-32.768KHZ-T, Check_prices=https://www.snapeda.com/parts/ABS07-32.768KHZ-9-T/Abracon/view-part/?ref=eda, MF=Abracon, MP=ABS07-32.768KHZ-9-T, SnapEDA_Link=https://www.snapeda.com/parts/ABS07-32.768KHZ-9-T/Abracon/view-part/?ref=snap, Supplier 1="Arrow Electronics"
Y2: "ABM3-8.000MHZ-D2Y-T, 8 MHz Â±20ppm Crystal 18pF 140 Ohms 2-SMD, No Lead", Package="SMD-2 Abracon", Supplier Part Number 1=ABM3-8.000MHZ-D2Y-T, Availability="In Stock", Check_prices=https://www.snapeda.com/parts/ABM3-8.000MHZ-D2Y-T/Abracon+LLC/view-part/?ref=eda, MF=Abracon, MP=ABM3-8.000MHZ-D2Y-T, Price=None, Purchase-URL=https://pricing.snapeda.com/search/part/ABM3-8.000MHZ-D2Y-T/?ref=eda, SnapEDA_Link=https://www.snapeda.com/parts/ABM3-8.000MHZ-D2Y-T/Abracon+LLC/view-part/?ref=snap, Supplier 1="Arrow Electronics"

## Via types
v1: diameter 27.56, hole 11.81, Top Layer to Bottom Layer, 112 vias

## Nets (pads, with @x,y where several pads share a name; then routed paths per layer and width w, separated by ;. In a path a pad name is that pad's centre, name@x,y a point inside that pad or via, vN(x,y) a via of type N, cw(c..) or ccw(c..) an arc to the next point about the centre after c; other vN are vias at no path point)
+3v3: C3.1 C10.2 C11.2 C12.1 C13.1 C14.1 C15.1 C16.2 H1.1 H3.3 H4.2 R2.1 R10.2 U1.1 U1.13 U1.19 U1.32 U1.48 U1.64 U2.5 U2.6 U2.7 | length 1555.4
  Top Layer w11.81: v1(900,1360) 900,1362.83 939.02,1401.85 C15.1 961.85,1401.85 976.32,1416.32 1008.53,1416.32 U1.13 ; v1(1000,1700) 996.99,1703.01 981.4,1703.01 950.98,1733.43 C14.1 950,1693.76 991.12,1652.64 U1.1 ; v1(1040,1740) 1087.27,1740 1087.36,1739.91 U1.64 1087.36,1793.86 1057.2,1824.02 C13.1 ; U1.19 1126.73,1210.83 1136.57,1200.98 C16.2 1133.01,1196.44 1133.01,1113.01 v1(1130,1110) ; U1.32 1382.64,1261.12 1439.68,1204.07 1439.68,1201.89 C11.2 1446.57,1141.65 1455.43,1132.8 C10.2 1457.72,1117.72 1457.72,1072.28 v1(1460,1070) ; U2.5 1435,2085 v1(1470,2120) ; U2.6 1450.74,2135 ; U2.7 1392.72,2178.11 1411.89,2178.11 v1(1470,2120) ; C3.1 1424.76,2012.8 1431.65,2019.69 1431.65,2020.67 1470,2059.02 v1(1470,2120) ; U1.48 1456.47,1652.64 1456.38,1652.73 1456.38,1733.94 1479.02,1756.57 C12.1 1506.57,1756.57 v1(1520,1770) ; R2.1 1576.32,437.9 1576.32,478.82 v1(1577.65,480.14) ; R10.2 v1(2160,420)
+5: C6.1 C7.2 H4.1 L1.2 U2.2 U2.3 U2.4 | length 3735.3
  Top Layer w12: C6.1 1028.54,2346.57 1046.54,2364.57 L1.2@1101.39,2364.57 ; C7.2 1100,2120 ; L1.2 1107.2,2364.57 1101.39,2358.76 1101.39,2354.56 1100,2353.17 1100,2210 ; U2.3 1125,2135 1100,2160 ; U2.2 1125,2185 1100,2210 ; v1(1520,1870) 1406.4,1870 1191.4,2085 U2.4 1135,2085 1100,2120 ; v1(1620,1870) 2250,1870 2490,1630 2800,1630 2900,1530 2900,1000 2780,880 2660,880 2594.55,814.55 H4.1 ; 1100,2120 1100,2160 ; 1100,2160 1100,2210
  Bottom Layer w12: v1(1520,1870) v1(1620,1870)
+VUSB: C5.1 D2.1 L1.1 R12.1 X1.A4 X1.A9 X1.B4 X1.B9 | length 1074.3
  Top Layer w10: C5.1 1026.57,2449.02 1040.16,2435.43 L1.1 1120,2508.83 1138.67,2527.5 1138.67,2528 1140.67,2530 D2.1 ; D2.1@1141.67,2530 1261.67,2650 1370,2650 1395.55,2675.55 1395.55,2705.37 1396.18,2706 1396.18,2720.2 1406.53,2730.55 ; X1.B4 1405.71,2731.38 1406.53,2730.55 ; 1483.62,2730.55 1488.86,2725.32 1488.86,2721.73 1494.29,2716.3 X1.A4 ; R12.1 1764.41,2833.94 1754.61,2843.74 1566.97,2843.74 1509.57,2786.34 1509.57,2782.76 1504.13,2777.32 X1.B9 1504.13,2756.46 1498.7,2751.02 1498.7,2747.44 1481.81,2730.55 1406.53,2730.55
ABM3_IN: C8.1 R6.2 Y2.2 | length 280.7
  Top Layer w11.81: C8.1 569.53,1635.71 Y2.2 679.84,1635.71 735.55,1580 R6.2
ABM3_OUT: C9.1 R9.2 Y2.1 | length 275.6
  Top Layer w11.81: C9.1 570.53,1474.29 Y2.1 679.84,1474.29 715.55,1510 R9.2
ABS07_IN: C2.1 R4.2 Y1.1 | length 185.9
  Top Layer w11.81: C2.1 545.32,1894.21 562.32,1877.21 Y1.1 641.75,1877.21 659.54,1895 R4.2
ABS07_OUT: C4.1 R5.2 Y1.2 | length 186.3
  Top Layer w11.81: C4.1 575.83,1760 578.87,1763.04 610.25,1763.04 Y1.2 641.75,1778.79 660.54,1760 R5.2
GND: C2.2 C3.2 C4.2 C5.2 C6.2 C7.1 C8.2 C9.2 C10.1 C11.1 C12.2 C13.2 C14.2 C15.2 C16.1 C17.1 C18.2 D1.2 D2.2 D3.2 H1.3 H3.1 H4.3 H4.4 R3.1 R7.2 R8.2 R11.2 RV1.2 RV2.2 S1.1 S2.2 U1.12 U1.18 U1.31 U1.47 U1.63 U2.1 U2.9 X1.A1 X1.A12 X1.B1 X1.B12 X1.MH | length 1373.3
  Top Layer w11.81: v1(920,2350) 922.2,2347.8 973.19,2347.8 C6.2 ; v1(920,2440) 963.43,2440 965.55,2442.13 966.54,2442.13 973.43,2449.02 C5.2 ; C15.2 965,1455 983.8,1436.2 1008.53,1436.2 U1.12 ; C16.1 1083.43,1200.98 1107.05,1224.61 U1.18 ; U1.63 1107.14,1731.47 1107.14,1821.79 C13.2 ; U2.1 1191.4,2235 1213.29,2256.89 1225.15,2256.89 v1(1228.16,2259.9) 1228.16,2255.64 1232.56,2251.24 1232.56,2220.04 1280,2172.6 U2.9 ; X1.MH@1279.92,2731.46 1293.36,2731.46 1320.92,2703.9 X1.A12 ; X1.MH@1308.27,2807.64 1315.16,2807.64 1346.65,2776.14 X1.B1 ; U1.31 1362.95,1226.46 1393.43,1195.98 C11.1 ; v1(1420,1920) 1421.89,1921.89 1421.89,1957.76 C3.2 ; U1.47 1461.47,1633.05 1485.21,1633.05 1494.72,1642.56 1494.72,1688.7 1487.87,1695.55 1487.87,1696.54 C12.2@1480.98,1703.43 ; C12.2 C12.2@1480.98,1703.43 ; v1(1520,1730) 1516.99,1726.99 1504.55,1726.99 C12.2@1480.98,1703.43 ; X1.A1 1572.83,2703.9 1600.39,2731.46 X1.MH@1620.08,2731.46 ; X1.B12 1563.78,2767.48 1563.78,2782.24 X1.MH@1591.73,2810.2 ; R8.2 1586.57,2683.95 1620.08,2717.45 X1.MH@1620.08,2731.46 ; D3.2 1754.56,2725.55 1748.66,2731.46 X1.MH@1620.08,2731.46
  other v1: 50,50 300,50 600,50 900,50 1200,50 1500,50 1800,50 2100,50 2500,50 2700,50 2950,50 1450,275 1925,275 50,300 2950,300 50,600 600,600 1300,600 1600,600 2000,600 2300,600 2950,600 50,900 1300,900 1600,900 2000,900 2300,900 2950,900 1000,1150 50,1200 600,1200 2000,1200 2300,1200 2950,1200 1590,1300 600,1350 800,1350 1650,1400 430,1470 50,1500 1550,1500 2950,1500 2000,1600 2300,1600 433.31,1646.69 800,1650 1650,1650 629.84,1713.47 430,1760 50,1800 2950,1800 879.84,1813.47 1250,1850 425,1895 1000,1900 550,2000 700,2000 50,2100 2950,2100 50,2400 600,2400 2950,2400 2100,2500 1700,2650 50,2700 1150,2700 2950,2700 1200,2800 1676.33,2805 1800,2900 50,3000 300,3000 600,3000 900,3000 1150,3000 1350,3000 1550,3000 1800,3000 2100,3000 2400,3000 2700,3000 2950,3000
LED_RES470: D1.1 R1.2 | length 79
  Top Layer w11.81: D1.1 R1.2
POWER_LED: D3.1 R12.2 | length 145.2
  Top Layer w10: R12.2 1815.59,2826.06 1822.4,2819.25 1840.75,2819.25 1850,2810 1850,2757.36 1825.43,2732.79 D3.1
STM32_BOOT0: R11.1 U1.60 | length 73.7
  Top Layer w11.81: U1.60 1166.2,1731.47 1166.2,1799.62 R11.1
STM32_LED: H2.1 R1.1 U1.21 | length 3001.5
  Top Layer w8: R1.1 1130,779.21 1166.1,815.31 1166.1,1046.97 ; U1.21 1166.1,1046.97 ; v1(1210,1030) 1183.07,1030 1166.1,1046.97
  Bottom Layer w8: v1(1210,1030) 1912.02,1732.02 2526.88,1732.02 2558.9,1700 2616.71,1700 2632.02,1715.31 2632.02,1865.51 2594.55,1902.98 H2.1
STM32_NRST: C18.1 H1.5 R10.1 S2.1 U1.7 | length 4572.4
  Top Layer w11.81: v1(960,1520) 963.01,1523.01 973.01,1523.01 984.43,1534.43 1008.53,1534.43 U1.7 ; C18.1 1796.57,419.02 1807.05,408.54 1807.05,313.58 2062.95,313.58 2058.19,318.35 2058.19,415.24 R10.1
  Bottom Layer w11.81: S2.1@1807.05,313.58 1730.63,390 1280,390 960,710 v1(960,1520) 1442.24,1520 1706.87,1784.63 2184.86,1784.63 2550.23,2150 2630,2150 2680,2200 2680,2320 2656.97,2343.03 2601.53,2343.03 H1.5
STM32_OSC32_IN: R4.1 U1.3 | length 415.4
  Top Layer w11.81: R4.1 774.33,1895 820,1849.33 820,1740 946.64,1613.36 1008.53,1613.36 U1.3
STM32_OSC32_OUT: R5.1 U1.4 | length 303.6
  Top Layer w11.81: R5.1 774.33,1760 940.75,1593.58 U1.4
STM32_OSC_IN: R6.1 U1.5 | length 132.2
  Top Layer w11.81: R6.1 885.04,1573.9 U1.5
STM32_OSC_OUT: R9.1 U1.6 | length 148
  Top Layer w11.81: R9.1 879.33,1510 923.54,1554.21 U1.6
STM32_PINA6: H2.2 U1.22 | length 1875.6
  Top Layer w11.81: U1.22 1185.79,1128.47 1200,1114.26 v1(1200,1110)
  Bottom Layer w8: v1(1200,1110) 1240,1110 1900,1770 2514.55,1770 H2.2
STM32_PINA7: H2.3 U1.23 | length 1845
  Top Layer w8: U1.23 1205.47,1189.47 1240,1154.94 1240,1125.47 1234.64,1120.12 v1(1234.64,1085.36)
  Bottom Layer w8: v1(1234.64,1085.36) 1899.29,1750 H2.3
STM32_SWCLK: H1.4 U1.49 | length 1843.9
  Top Layer w8: U1.49 1382.64,1777.35 1390,1784.71 v1(1390,1790)
  Bottom Layer w8: v1(1390,1790) 1591.87,1991.87 1591.87,2001.87 1790,2200 2610,2200 2640,2230 2640,2270 2622.53,2287.47 2562.53,2287.47 2535.45,2314.55 2527.28,2322.72 2527.28,2407.28 2561.11,2441.11 2585.67,2441.11 H1.4
STM32_SWDIO: H1.2 U1.46 | length 2022.9
  Top Layer w8: U1.46 1493.27,1613.27 v1(1540,1660)
  Bottom Layer w8: v1(1540,1660) 2060,2180 2610,2180 2660,2230 2660,2270 2619.57,2310.43 2617.46,2312.54 2615.27,2312.72 2604.73,2312.72 2604.54,2312.54 2567.46,2312.54 2540,2340 2540,2370 2570,2400 2597.55,2400 2632.03,2434.48 2632.03,2612.53 H1.2
STM32_SWO: H1.6 U1.55 | length 1582.3
  Top Layer w8: U1.55 1266.53,1733.38 1266.53,1786.53 v1(1270,1790)
  Bottom Layer w8: v1(1270,1790) 1398.28,1918.28 1398.28,1929 1719.29,2250 H1.6
STM32_UART_RX: H3.4 U1.17 | length 1841.3
  Top Layer w11.81: U1.17 1087.46,1278.72 1087.46,1302.45 1096.97,1311.96 1439.97,1311.96 1741.31,1010.63 2610.87,1010.63 2633.93,1033.69 2633.93,1110.64 H3.4
STM32_UART_TX: H3.5 U1.16 | length 1713.2
  Top Layer w11.81: U1.16 1417.96,1357.36 1725.32,1050 H3.5
STM32_USER_BUTTON: C1.2 R2.2 S1.2 U1.2 | length 1976
  Top Layer w11.81: v1(960,1640) 964.26,1640 971.31,1632.95 U1.2 ; S1.2@1327.05,308.58 1582.95,308.58 1578.98,312.56 1578.98,379.45 R2.2 1568.11,390.31 1560.28,390.31 1511.57,439.02 C1.2
  Bottom Layer w11.81: v1(960,1640) 936.38,1616.38 936.38,699.25 S1.2@1327.05,308.58
STM32_VCAP1: C17.2 U1.30 | length 110.4
  Top Layer w11.81: C17.2 1280.91,1216.34 1304.72,1216.34 1343.17,1254.79 1343.17,1278.53 U1.30
UB_CAP_RES: C1.1 R3.2 | length 61.9
  Top Layer w11.81: R3.2 C1.1
USB_CC1: R8.1 X1.A5 | length 99
  Top Layer w10: X1.A5 1474.92,2703.58 1474.92,2687.6 1523.74,2638.78 1525.63,2638.78 1532.52,2631.89 R8.1@1532.52,2630
USB_CC2: R7.1 X1.B5 | length 313.7
  Top Layer w10: R7.1 1360.11,2860 1425.39,2794.71 X1.B5
USB_D_N: RV2.1 U1.44 X1.A7 X1.B7 | length 1781.4
  Top Layer w8: v1(1430,2620) 1430,2625.29 1435.24,2630.53 X1.A7 ; v1(1445.71,2890.48) 1490.23,2890.48 1511.72,2869 1511.72,2847.29 1464.76,2800.34 X1.B7 ; U1.44 1463.38,1575.9 1525.9,1575.9 1590,1640 1590,2369.92 1594,2373.92 1594,2379.04 1604.96,2390 RV2.1 1610.08,2419.92 1480.23,2549.77 1480.23,2569.77 v1(1480,2570)
  Bottom Layer w8: v1(1445.71,2890.48) 1445.71,2640.74 1430,2625.03 v1(1430,2620) v1(1480,2570)
USB_D_P: RV1.1 U1.45 X1.A6 X1.B6 | length 1673
  Top Layer w8: X1.B6 1445.08,2815.08 v1(1490,2860) ; v1(1450,2530) 1483.12,2530 1539.92,2473.2 RV1.1 1573.88,2356.04 1573.88,1643.56 1525.9,1595.58 1463.38,1595.58 U1.45 ; X1.A6 1454.92,2645.08 v1(1480,2620)
  Bottom Layer w8: v1(1450,2530) 1453.74,2533.74 1474.45,2533.74 1501.72,2561 1501.72,2598.28 v1(1480,2620) 1480,2625.29 1490,2635.29 v1(1490,2860)
pads on no net: H3.2 H3.6 U1.8 U1.9 U1.10 U1.11 U1.14 U1.15 U1.20 U1.24 U1.25 U1.26 U1.27 U1.28 U1.29 U1.33 U1.34 U1.35 U1.36 U1.37 U1.38 U1.39 U1.40 U1.41 U1.42 U1.43 U1.50 U1.51 U1.52 U1.53 U1.54 U1.56 U1.57 U1.58 U1.59 U1.61 U1.62 U2.8 X1.A2 X1.A3 X1.A8 X1.A10 X1.A11 X1.B2 X1.B3 X1.B8 X1.B10 X1.B11

## Polygon pours and split planes (outlines as drawn)
+3v3 on Power Layer "Power" (solid, pour order 1): 0,2950 cw(c75,2975) 50,3050 2950,3050 cw(c2925.01,2975) 3000,2950 3000,50 cw(c2950,50) 2950,0 50,0 cw(c50,50) 0,50
GND on Ground Layer "GND" (solid, pour order 0): 0,2950 cw(c75,2975) 50,3050 2950,3050 cw(c2925.01,2975) 3000,2950 3000,50 cw(c2950,50) 2950,0 50,0 cw(c50,50) 0,50
GND on Top Layer "GND" (solid, pour order 4): 8.85,2961.07 cw(c73.89,2984.96) 50,3050 2950,3050 cw(c2934.97,2976.11) 3008.85,2961.07 3008.85,61.07 cw(c2958.86,61.07) 2958.85,11.07 58.85,11.07 cw(c58.85,61.07) 8.85,61.07
GND on Bottom Layer "GND" (solid, pour order 5): 8.65,2950 cw(c79.33,2979.33) 50,3050 2950,3050 cw(c2929.33,2970.68) 3008.65,2950 3008.65,50 cw(c2958.66,50) 2958.65,0 58.65,0 cw(c58.65,50) 8.65,50

## Silkscreen, mask and mechanical layers (free items; w line width, h text height)
Top Overlay:
  drawing of 4 lines, arcs and shapes, not listed
  text "STM32" at 2257.8,200.39 h47.24
  text "Template" at 2190.83,136.26 h47.24
  text "PCB" at 2306.03,51.39 h47.24

## Text inside footprints (layer, text, board x,y; h text height)
H1: Top Overlay "+3v3" at 2666.55,2735 h30; Top Overlay "SWDIO" at 2666.56,2635 h30; Top Overlay "GND" at 2666.56,2535 h30; Top Overlay "SWCLK" at 2666.56,2435 h30; Top Overlay "NRST" at 2666.56,2335 h30; Top Overlay "SWO" at 2666.56,2235 h30
H2: Top Overlay "PA5" at 2666.55,1935 h30; Top Overlay "PA6" at 2666.55,1835 h30; Top Overlay "PA7" at 2666.55,1735 h30
H3: Top Overlay "RTS" at 2666.56,935 h30; Top Overlay "MCU_TX" at 2666.56,1037.5 h30; Top Overlay "MCU_RX" at 2666.56,1137.5 h30; Top Overlay "GND" at 2666.56,1435 h30; Top Overlay "CTS" at 2666.56,1335 h30; Top Overlay "+3v3" at 2671.56,1235 h30
H4: Top Overlay "+5V" at 2666.55,635 h30; Top Overlay "+3v3" at 2666.55,535 h30; Top Overlay "GND" at 2666.55,435 h30; Top Overlay "GND" at 2666.55,335 h30
U1: Top Overlay "REFDES" at 1147.5,1480 h50